# EAGLE board science arm board (EAGLE 6.5.0)
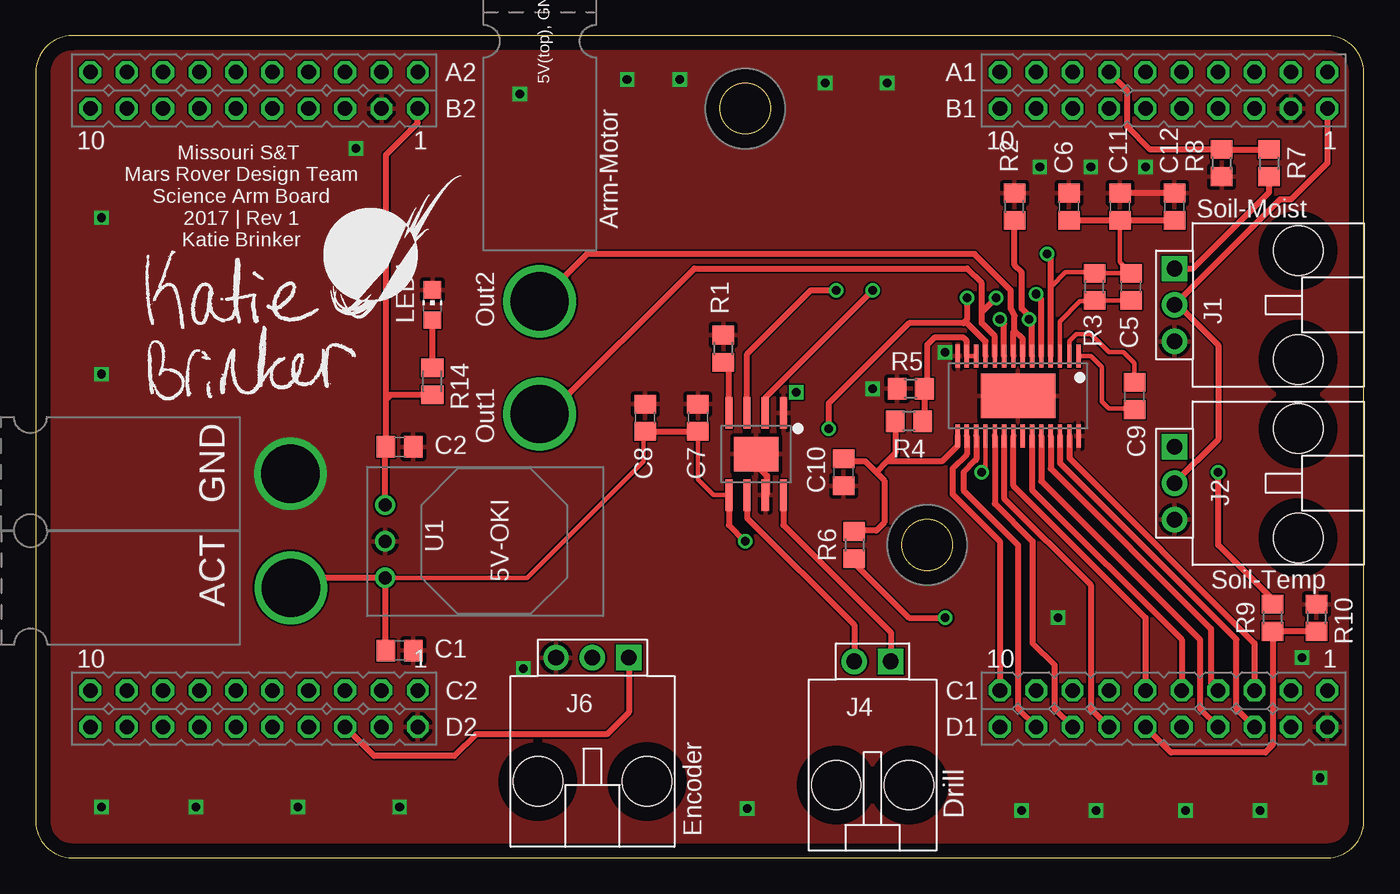
[diagram p0: board, top side]
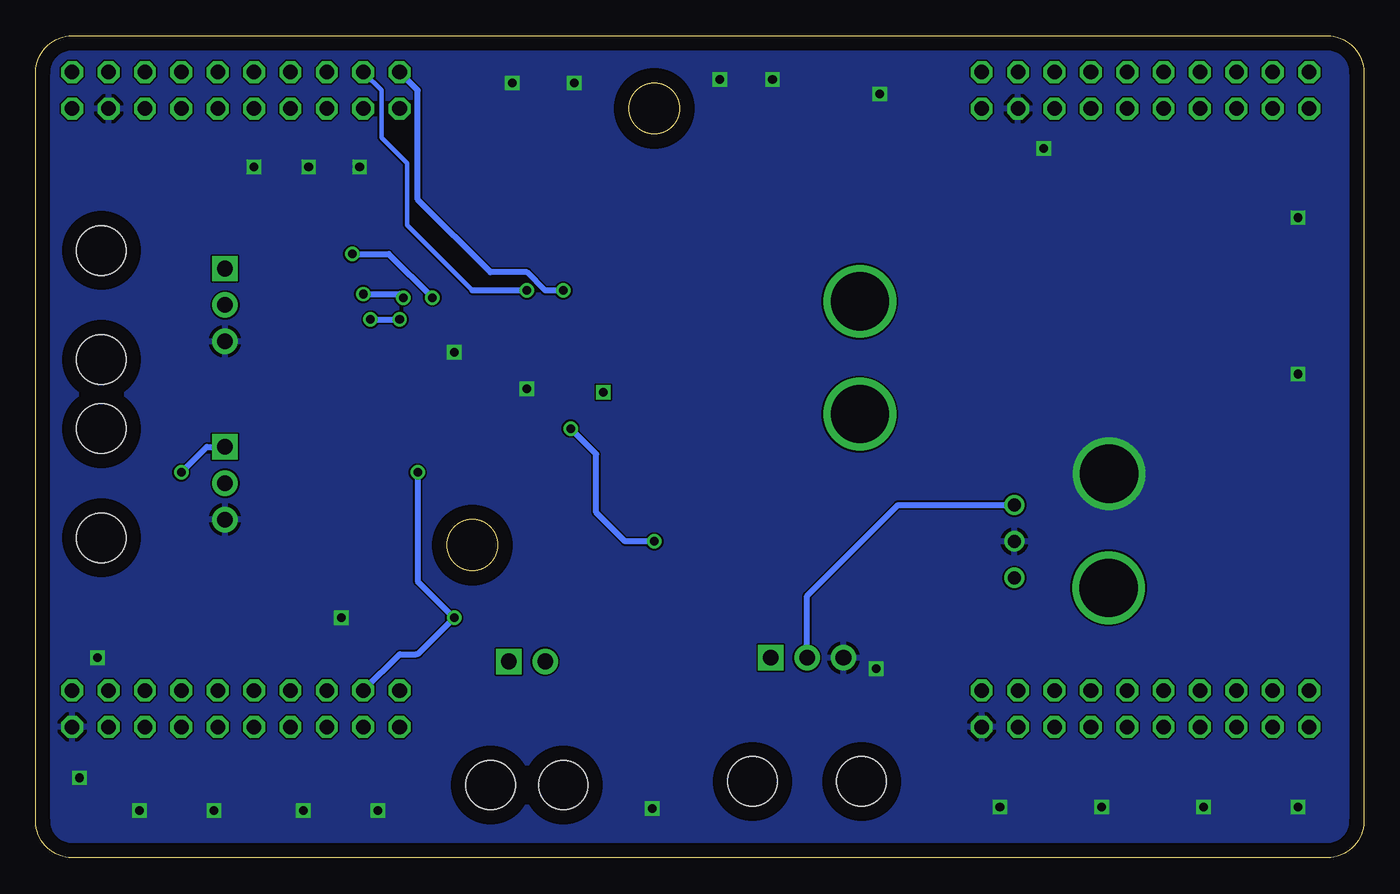
[diagram p1: board, bottom side, seen from below]

Size 92.71 x 57.4 mm. Coordinates in mm from the lower left corner, seen from the top.
Outline: 0,54.86 0,2.54 arc90 2.54,0 90.17,0 arc90 92.71,2.54 92.71,54.86 arc90 90.17,57.4 2.54,57.4 arc90 0,54.86
Copper layers (1*16): Top 0.035mm / dielectric 1.5mm / Bottom 0.035mm
Design rules "advanced_circuits_standard": minimum track width 5mil, minimum drill 10mil, track to track 5mil, track to pad 5mil, pad to pad 5mil, via to via 5mil, smd to smd 5mil, copper to edge 40mil, drill to drill 5mil, minimum pad ring 10mil, minimum via ring 8mil, stop-mask expansion 4mil, vias tented up to drill 0mil, thermal gap 10mil

## Footprints (pad centres in the part's own frame; a part is rotated, then mirrored left to right if it is on the bottom)
APP45_PCB_HORIZ_RIGHT = drill 4.064: P$1 28.194,3.969
C0805 = smd 1.3 x 1.5: 1 -0.95,0; 2 0.95,0
MOLEX_SL_03_TH = drill 1.092 pad 1.778 square: 1 -2.54,0 | drill 1.092 pad 1.778: 2 0,0; 3 2.54,0 | hole 3.454: -3.81,8.636; 3.81,8.636
APP45_5V_HORIZ_CONFIG = drill 4.064: 5V 36.068,3.937; GND 28.194,3.937
MOLEX-70551-0001 = drill 1.092 pad 1.778 square: 1 -1.27,0 | drill 1.092 pad 1.778: 2 1.27,0 | hole 3.454: -2.54,8.636; 2.54,8.636
CHIP-LED0805 = smd 1.2 x 1.2: A 0,-1.05; C 0,1.05
R0805 = smd 1.3 x 1.5: 1 -0.95,0; 2 0.95,0
M0805 = smd 1.3 x 1.6: 1 -0.95,0; 2 0.95,0
OKI-78SR_HORIZ = drill 0.9 pad 1.422: 1 0,0; 2 -2.54,0; 3 -5.08,0
TIVA-C-CONNECTED = drill 1.016 octagon: +3V3_1 59.69,54.61; +3V3_2 123.19,54.61; +5V_1 59.69,52.07; +5V_2 123.19,52.07; GND_1 57.15,52.07; GND_2 59.69,8.89; GND_3 120.65,52.07; GND_4 123.19,8.89; PA4 39.37,52.07; PA5 36.83,52.07; PA6 105.41,52.07; PA7 52.07,8.89; PB2 102.87,54.61; PB3 100.33,54.61; PB4 54.61,52.07; PB5 52.07,52.07; PC4 118.11,54.61; PC5 115.57,54.61; PC6 113.03,54.61; PC7 105.41,54.61; PD0 107.95,8.89; PD1 110.49,8.89; PD2 57.15,54.61; PD3 107.95,54.61; PD4 49.53,54.61; PD5 46.99,54.61; PD7 107.95,52.07; PE0 118.11,52.07; PE1 115.57,52.07; PE2 113.03,52.07; PE3 110.49,52.07; PE4 120.65,54.61; PE5 110.49,54.61; PF1 123.19,11.43; PF2 120.65,11.43; PF3 118.11,11.43; PG0 115.57,11.43; PG1 59.69,11.43; PH0 44.45,11.43; PH1 41.91,11.43; PH2 118.11,8.89; PH3 115.57,8.89; PK0 49.53,52.07; PK1 46.99,52.07; PK2 44.45,52.07; PK3 41.91,52.07; PK4 57.15,11.43; PK5 54.61,11.43; PK6 39.37,11.43; PK7 36.83,11.43; PL0 107.95,11.43; PL1 105.41,11.43; PL2 102.87,11.43; PL3 100.33,11.43; PL4 113.03,11.43; PL5 110.49,11.43; PM0 52.07,11.43; PM1 49.53,11.43; PM2 46.99,11.43; PM3 120.65,8.89; PM4 102.87,52.07; PM5 100.33,52.07; PM6 36.83,8.89; PM7 57.15,8.89; PN2 105.41,8.89; PN3 102.87,8.89; PN4 36.83,54.61; PN5 39.37,54.61; PP0 54.61,54.61; PP1 52.07,54.61; PP2 100.33,8.89; PP3 41.91,8.89; PP4 41.91,54.61; PP5 54.61,8.89; PQ0 44.45,54.61; PQ1 39.37,8.89; PQ2/PA3 46.99,8.89; PQ3/PA2 44.45,8.89; RST1 49.53,8.89; RST_2 113.03,8.89
DRV8842 = smd 1.6 x 0.3: CP1 -2.794,4.216; CP2 -2.794,3.581; DECAY 2.794,-1.626; GND -2.794,-4.216; GND1 2.794,4.216; I0 2.794,0.975; I1 2.794,1.626; I2 2.794,2.276; I3 2.794,2.921; I4 2.794,3.581; IN1 2.794,-0.325; IN2 2.794,-0.975; ISEN -2.794,0.975; ISEN1 -2.794,-0.975; NC 2.794,0.325; NFAULT 2.794,-2.276; NRESET 2.794,-3.581; NSLEEP 2.794,-2.921; OUT1 -2.794,1.626; OUT2 -2.794,0.325; OUTPUT1 -2.794,-1.626; OUTPUT2 -2.794,-0.325; V3P3OUT 2.794,-4.216; VCP -2.794,2.921; VM -2.794,2.276; VM1 -2.794,-2.276; VREF -2.794,-2.921; VREF1 -2.794,-3.581 | smd 3.099 x 5.182: PPAD 0,0
DRV8871 = smd 2.2 x 0.5: GND -2.87,1.905; ILIM -2.87,-1.905; IN1 -2.87,-0.635; IN2 -2.87,0.635; OUT1 2.87,-0.635; OUT2 2.87,1.905; PGND 2.87,0.635; VM 2.87,-1.905 | smd 2.4 x 3.099: PPAD 0,0

## Placement (x,y rotation side)
ACT  APPPP45_PCB_HORIZ_RIGHT  [APP45_PCB_HORIZ_RIGHT]  -10.39,14.88 0 top
C1  10uF  [C0805]  25.4,14.48 0 top
C2  22uF  [C0805]  25.4,28.7 0 top
C5  0.1uF  [C0805]  76.45,39.88 90 top
C6  0.1uF  [C0805]  72.14,45.47 90 top
C7  0.1uF  [C0805]  46.23,30.73 90 top
C8  47uF  [C0805]  42.55,30.73 90 top
C9  0.01uF  [C0805]  76.71,32.26 270 top
C10  0.47uF  [C0805]  56.39,26.92 270 top
C11  100uF  [C0805]  75.69,45.47 90 top
C12  0.1uF  [C0805]  79.5,45.47 90 top
GND  APPPP45_PCB_HORIZ_RIGHT  [APP45_PCB_HORIZ_RIGHT]  -10.41,22.86 0 top
H1  MOUNTING_HOLE#6  [#6_SCREW]  49.53,52.32 0 top
H5  MOUNTING_HOLE#6  [#6_SCREW]  62.23,21.84 0 top
J1  SL03THROUGH_HOLE  [MOLEX_SL_03_TH]  79.5,38.61 270 top
J2  SL03THROUGH_HOLE  [MOLEX_SL_03_TH]  79.5,26.16 270 top
J3  APP_2POS_CONFIG5V_HORIZ  [APP45_5V_HORIZ_CONFIG]  31.24,67.06 270 top
J4  SL02-HORIZ  [MOLEX-70551-0001]  58.42,13.72 180 top
J6  SL03THROUGH_HOLE  [MOLEX_SL_03_TH]  38.86,13.97 180 top
LED1  [CHIP-LED0805]  27.69,38.61 0 top
LOGO1  MRDT_LOGO  [MRDT_LOGO]  20.07,36.83 0 top
R1  30k  [R0805]  48.01,35.56 90 top
R2  100m  [R0805]  68.33,45.47 90 top
R3  1M  [R0805]  73.91,39.88 90 top
R4  34k  [R0805]  60.96,30.48 180 top
R5  10k  [R0805]  61.09,32.77 0 top
R6  10k  [R0805]  57.15,21.84 270 top
R7  10k  [R0805]  86.11,48.51 270 top
R8  19.3k  [R0805]  82.8,48.51 90 top
R9  10k  [R0805]  86.36,16.76 90 top
R10  19.3k  [R0805]  89.41,16.76 270 top
R14  330  [M0805]  27.69,33.27 270 top
U1  OKI-78SR-5/1.5-W36HC  [OKI-78SR_HORIZ]  24.38,19.56 270 top
U$1  TIVA-1294  [TIVA-C-CONNECTED]  -33.02,0.25 0 top
U$2  DRV8842  [DRV8842]  68.58,32.26 270 top
U$3  DRV8871  [DRV8871]  50.29,28.19 270 top
U$5  KATIE-BRINKER  [KATIE-BRINKER-SIG]  7.62,32.13 0 top

## Library data of the parts
ACT GND J4 = MRDT-Connectors
C1 C2 C5-C12 R1-R10 R14 = rcl
H1 H5 LOGO1 = MRDT-Hardware
J1 J2 J6 = MRDT-Connectors; ORIENT: HORIZ; PARTNO: 0705550002
J3 = MRDT-Connectors; COLOR1: RED; COLOR2: BLACK
LED1 = led
U1 = MRDT-ICs; VOUT: +5v
U$1 = MRDT-Microcontrollers
U$2 = DRV8842
U$3 = drill-motor-driver
U$5 = sig

## Nets
3V3: C10.1 R4.2 R6.1 U$2.V3P3OUT
5V-EXT: C2.1 J1.2 J2.2 J6.2 R14.2 U1.3 U$1.+5V_1 U$1.+5V_2
12V-ACT: ACT.P$1 C1.1 C5.2 C6.1 C7.1 C8.1 C11.1 C12.1 R3.2 U1.1 U$2.VM U$2.VM1 U$3.VM
DECAY: U$1.PN2 U$2.DECAY
ENCODER-OUT: J6.1 U$1.PP5
FAULT: R6.2 U$1.PL2 U$2.NFAULT
GND: C1.2 C2.2 C6.2 C7.2 C8.2 C10.2 C11.2 C12.2 GND.P$1 J1.3 J2.3 J6.3 LED1.C R1.2 R2.2 R5.1 R8.1 R10.1 U1.2 U$1.GND_1 U$1.GND_2 U$1.GND_3 U$1.GND_4 U$2.GND U$2.GND1 U$2.PPAD U$3.GND U$3.PGND U$3.PPAD
I0: U$1.PL4 U$2.I0
I1: U$1.PH3 U$2.I1
I2: U$1.PG0 U$2.I2
I3: U$1.PH2 U$2.I3
I4: U$1.PF3 U$2.I4
IN1-DRILL: U$1.PB3 U$3.IN1
IN1-MAIN: U$1.PL5 U$2.IN1
IN2-DRILL: U$1.PB2 U$3.IN2
IN2-MAIN: U$1.PD0 U$2.IN2
N$1: R1.1 U$3.ILIM
N$2: J4.1 U$3.OUT2
N$3: R2.1 U$2.ISEN U$2.ISEN1
N$6: C9.2 U$2.CP1
N$7: C9.1 U$2.CP2
N$8: C5.1 R3.1 U$2.VCP
N$9: R4.1 R5.2 U$2.VREF U$2.VREF1
N$35: J1.1 R7.2
N$36: J2.1 R9.2
N$37: LED1.A R14.1
OUT1: J4.2 U$3.OUT1
OUTPUT1: J3.5V U$2.OUT1 U$2.OUTPUT1
OUTPUT2: J3.GND U$2.OUT2 U$2.OUTPUT2
RESET: U$1.PL3 U$2.NRESET
SLEEP: U$1.PN3 U$2.NSLEEP
SOIL-MOIST: R7.1 R8.2 U$1.PD3
SOIL-TEMP: R9.1 R10.2 U$1.PD1

## Tracks (layer width: path | path; a pad name or v marks a point on that pad's centre or on a via)
3V3
  Top 0.406: 59.44,27.69 63.25,27.69 64.36,28.8 U$2.V3P3OUT | 59.44,27.69 58.67,26.92 | R4.2 60.01,28.26 59.44,27.69 | 58.67,26.92 59.25,26.35 59.25,23.43 58.67,22.86 57.22,22.86 R6.1 | 58.67,26.92 57.91,27.69 56.84,27.69 arc-45 C10.1
5V-EXT
  Top 0.406: U1.3 24.38,28.64 C2.1 24.45,32 | 24.45,32 24.45,49.09 26.67,51.31 U$1.+5V_1 | U$1.+5V_2 90.17,48.51 87.63,45.97 86.87,45.97 J1.2 79.76,38.61 82.55,35.81 82.55,29.21 J2.2 | R14.2 24.77,32.32 24.45,32
  Bottom 0.406: J6.2 38.86,18.29 32.51,24.64 U1.3
12V-ACT  (via drill 0.6)
  Top 0.305: U$2.VM 70.86,39.87 71.88,40.89 73.85,40.89 R3.2 C5.2 75.69,41.59 C11.1 | U1.1 34.29,19.56 42.42,27.69 42.42,29.66 C8.1 | U$3.VM 47.32,25.32 46.23,26.42 C7.1
  Top 0.406: C6.1 C11.1 C12.1 | C8.1 C7.1 | C1.1 24.38,14.54 U1.1 18.51,19.56 ACT.P$1 | U$3.VM 48.39,23.24 v49.53,22.1 | v55.37,29.97 55.37,31.75 60.96,37.34 64.77,37.34 | U$2.VM1 66.3,36.06 65.02,37.34 64.77,37.34 | U$2.VM 70.86,41.92 v70.61,42.16 | v65.02,39.12 65.02,37.59 64.77,37.34
  Bottom 0.406: v49.53,22.1 51.56,22.1 53.59,24.13 53.59,28.19 v55.37,29.97 | v70.61,42.16 68.07,42.16 v65.02,39.12
DECAY
  Top 0.406: U$2.DECAY 66.95,24.74 69.6,22.1 69.6,14.99 71.12,13.46 71.12,10.41 U$1.PN2
ENCODER-OUT
  Top 0.406: J6.1 41.4,10.16 39.88,8.64 30.73,8.64 29.21,7.11 23.62,7.11 U$1.PP5
FAULT  (via drill 0.6)
  Top 0.305: U$2.NFAULT 66.3,27.19 v66.04,26.92
  Top 0.406: 66.24,27.13 v66.04,26.92 | R6.2 57.15,20.57 60.96,16.76 v63.5,16.76
  Bottom 0.406: v66.04,26.92 66.04,19.3 v63.5,16.76 65.97,14.3 arc45 66.14,14.22 67.31,14.22 U$1.PL2
GND  (via drill 0.6)
  Top 0.406: C12.2 C11.2 | U$3.PPAD 50.29,27.43 51.05,26.67 51.05,25.45 U$3.PGND
  other vias: 58.42,32.77 34.04,13.21 63.5,35.31 4.57,44.7 4.57,33.78 22.35,49.53 59.44,54.1 44.96,54.36 49.66,3.43 68.83,3.3 74.04,3.3 80.26,3.3 85.47,3.3 89.66,5.59 18.29,3.56 25.4,3.56 11.18,3.56 4.57,3.56 33.78,53.34 41.27,54.36 55.12,54.1 77.47,48.26 88.39,13.97 73.66,48.26 70.1,48.26 71.37,16.76
  pour Top: -14.53,62.29 -11.23,-5.23 96.52,-5.33 99.82,61.98
  pour Bottom: -14.53,61.02 -14.27,-1.42 96.77,-6.86 98.81,60.71
I0
  Top 0.406: U$2.I0 69.56,25.7 80.01,15.24 U$1.PL4
I1
  Top 0.406: U$2.I1 70.21,26.31 81.28,15.24 81.28,10.41 U$1.PH3
I2
  Top 0.406: U$2.I2 70.86,27.19 82.04,16 82.04,12.19 U$1.PG0
I3
  Top 0.406: U$2.I3 71.5,27.56 83.82,15.24 83.82,10.41 U$1.PH2
I4
  Top 0.406: U$2.I4 72.16,27.92 85.09,14.99 U$1.PF3
IN1-DRILL  (via drill 0.6)
  Top 0.406: v55.88,39.62 54.1,39.62 49.66,35.18 U$3.IN1
  Bottom 0.406: v55.88,39.62 57.15,39.62 58.42,40.89 60.96,40.89 66.04,45.97 66.04,53.59 U$1.PB3
IN1-MAIN
  Top 0.406: U$2.IN1 68.25,25.98 77.47,16.76 U$1.PL5
IN2-DRILL  (via drill 0.6)
  Top 0.406: U$3.IN2 50.93,32.13 v58.42,39.62
  Bottom 0.305: 62.23,39.62 66.8,44.2 66.8,48.51 68.58,50.29 68.58,53.59 U$1.PB2
  Bottom 0.406: v58.42,39.62 62.23,39.62
IN2-MAIN
  Top 0.406: U$2.IN2 67.61,25.11 73.66,19.05 73.66,10.41 U$1.PD0
N$1
  Top 0.406: U$3.ILIM 48.39,34.23 R1.1
N$2
  Top 0.406: J4.1 59.69,15.75 52.2,23.24 U$3.OUT2
N$3  (via drill 0.6)
  Top 0.406: 67.56,35.09 U$2.ISEN1 67.61,37.3 v67.31,37.59 | R2.1 68.33,41.4 68.83,40.89 68.83,38.35 69.3,37.89 69.3,37.63 v69.34,37.59 69.56,37.38 U$2.ISEN
  Bottom 0.406: v69.34,37.59 v67.31,37.59
N$6
  Top 0.305: U$2.CP1 73.66,35.05 74.42,34.29 74.42,31.88 74.93,31.37 76.65,31.37 C9.2
N$7
  Top 0.305: U$2.CP2 72.16,36.09 72.64,36.58 73.66,36.58 74.93,35.31 75.95,35.31 76.71,34.54 C9.1
N$8
  Top 0.305: U$2.VCP 71.5,37.46 72.9,38.86 73.85,38.86 R3.1 C5.1
N$9
  Top 0.305: 65.66,35.69 U$2.VREF U$2.VREF1
  Top 0.406: R4.1 62.04,30.61 R5.2 62.23,32.96 62.23,35.81 62.74,36.32 64.77,36.32 65,36.09 U$2.VREF1
N$22  (via drill 0.6)
  other vias: 53.09,32.51
N$35
  Top 0.406: J1.1 80.77,41.15 86.11,46.48 R7.2
N$36  (via drill 0.6)
  Top 0.406: R9.2 86.36,18.03 82.55,21.84 v82.55,26.92
  Bottom 0.406: v82.55,26.92 80.77,28.7 J2.1
N$37
  Top 0.406: R14.1 LED1.A
OUT1
  Top 0.406: J4.2 57.15,16.26 49.66,23.75 U$3.OUT1
OUTPUT1  (via drill 0.6)
  Top 0.406: J3.5V 35.81,30.99 45.97,41.15 65.02,41.15 66.04,40.13 66.04,38.1 | U$2.OUTPUT1 66.95,36.42 66.04,37.34 66.04,38.1 | U$2.OUT1 70.21,39.01 v69.85,39.37 | v67.06,39.12 66.04,38.1
  Bottom 0.406: v69.85,39.37 67.31,39.37 v67.06,39.12
OUTPUT2
  Top 0.406: U$2.OUTPUT2 68.25,36.76 68.33,36.83 | U$2.OUT2 68.91,36.25 68.33,36.83 | J3.GND 38.48,42.16 65.53,42.16 68.07,39.62 68.07,38.35 68.33,37.85 68.33,36.83
RESET
  Top 0.406: U$2.NRESET 65,28.17 64.01,27.18 64.01,25.4 67.31,22.1 U$1.PL3
SLEEP
  Top 0.305: 65.66,27.81 65.62,27.77
  Top 0.406: 65.62,27.77 64.77,26.92 64.77,25.65 68.58,21.84 68.58,10.41 U$1.PN3 | U$2.NSLEEP 65.66,27.81
SOIL-MOIST
  Top 0.406: R7.1 R8.2 77.79,49.46 76.2,51.05 76.2,53.59 U$1.PD3
SOIL-TEMP
  Top 0.406: R10.2 R9.1 86.36,7.87 85.85,7.37 79.25,7.37 U$1.PD1

## Text on the board
tPlace: Arm-Motor | Soil-Moist | Out2 | Out1 | GND | 5V-OKI | Soil-Temp | ACT | Drill | Encoder
tNames: Missouri S&T / Mars Rover Design Team / Science Arm Board / 2017 | Rev 1 / Katie Brinker